# Altium PCB SCBD-10-63HP.PcbDoc
Units mm, origin at the board's own origin, x right, y up, seen from the top; angles counter-clockwise.
Board outline 31.37 x 27.3 mm, 2 copper layers (Top Layer, Bottom Layer); 7 components, 7 nets, 41 pads, 7 vias.
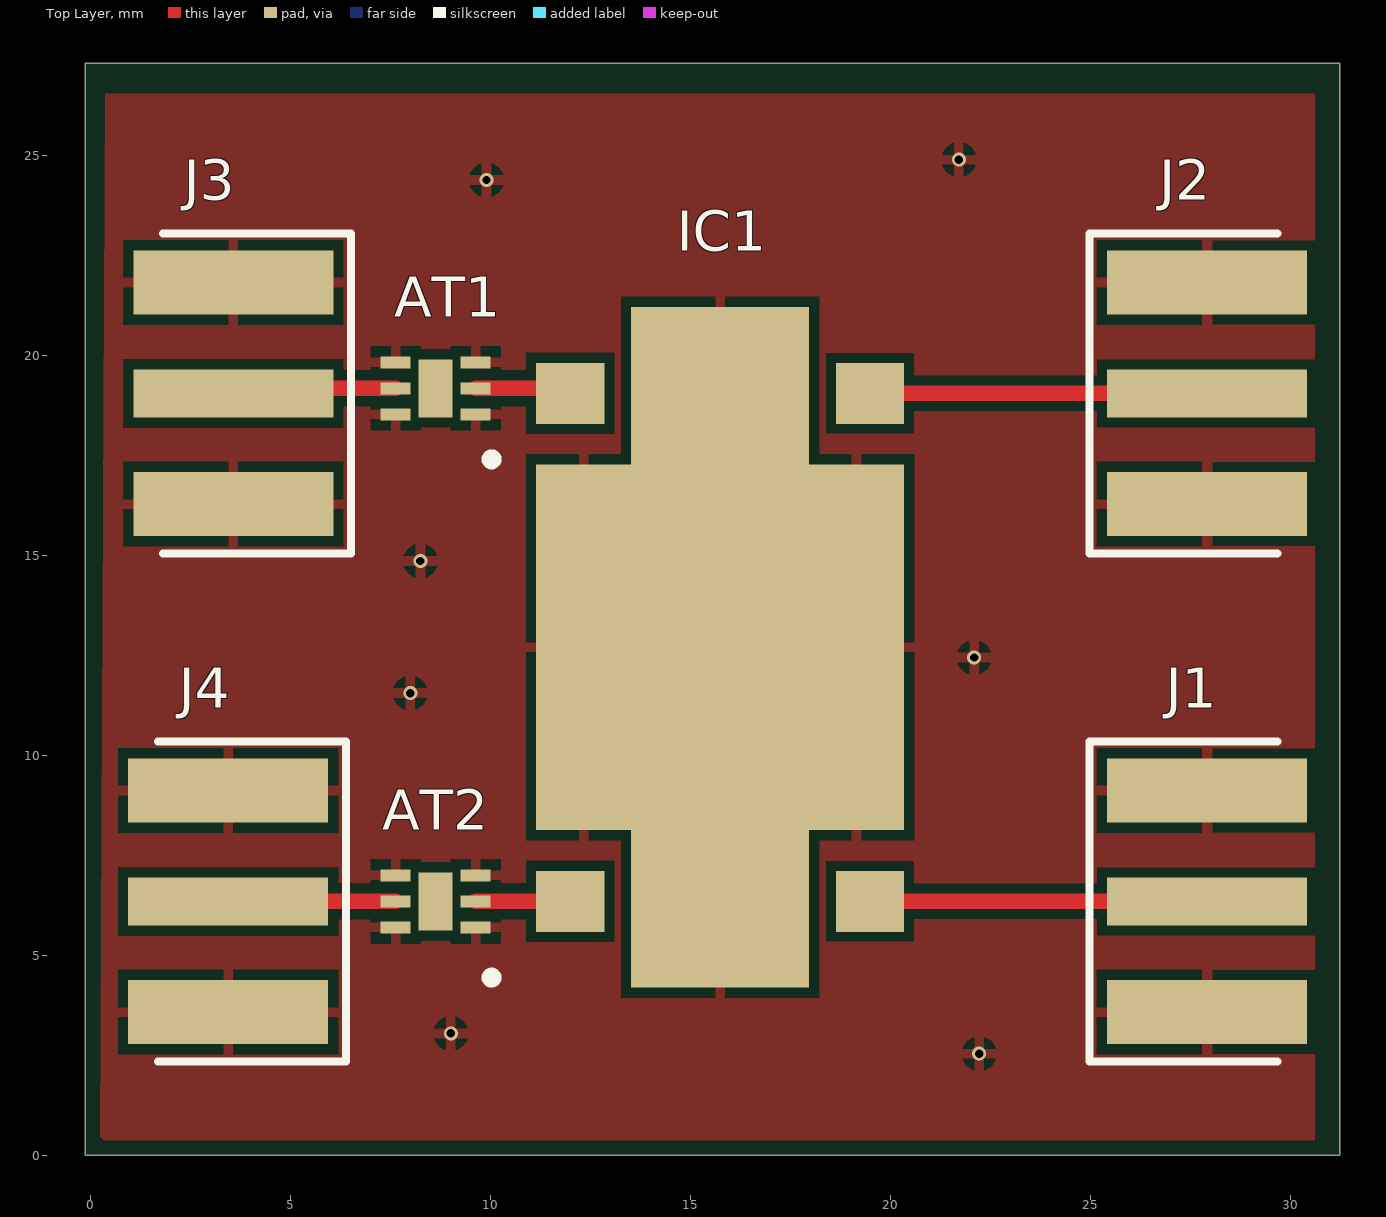
[diagram p0: Top Layer view]
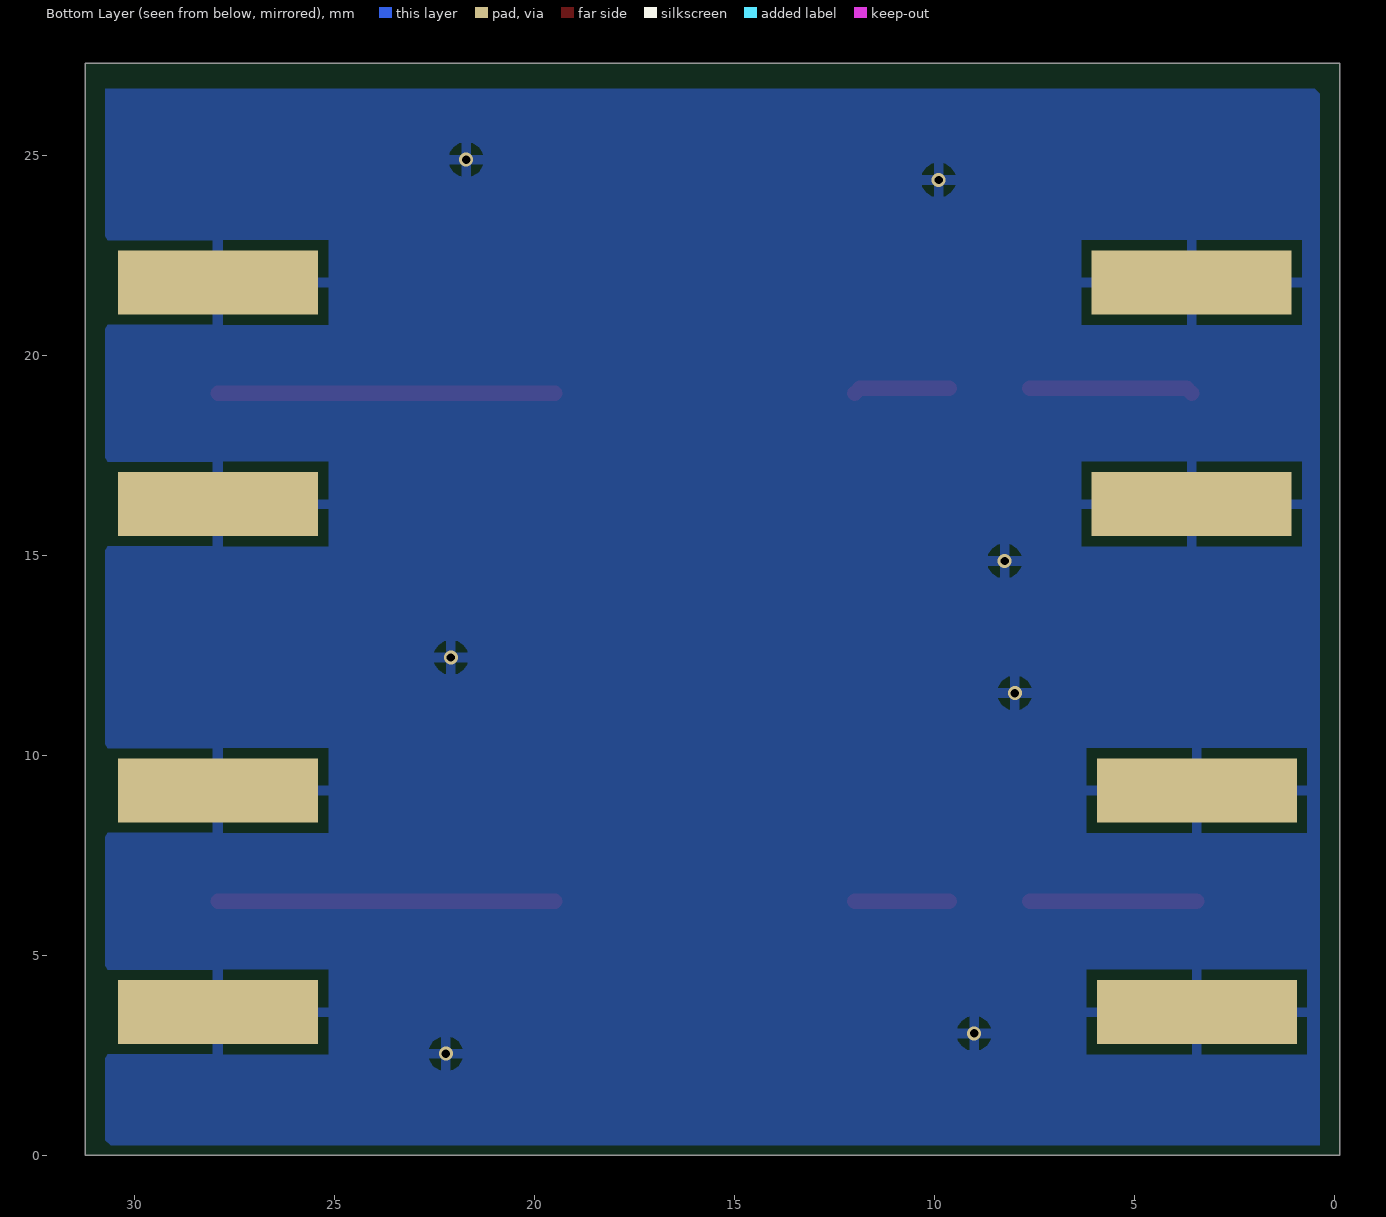
[diagram p1: Bottom Layer view, seen from below]
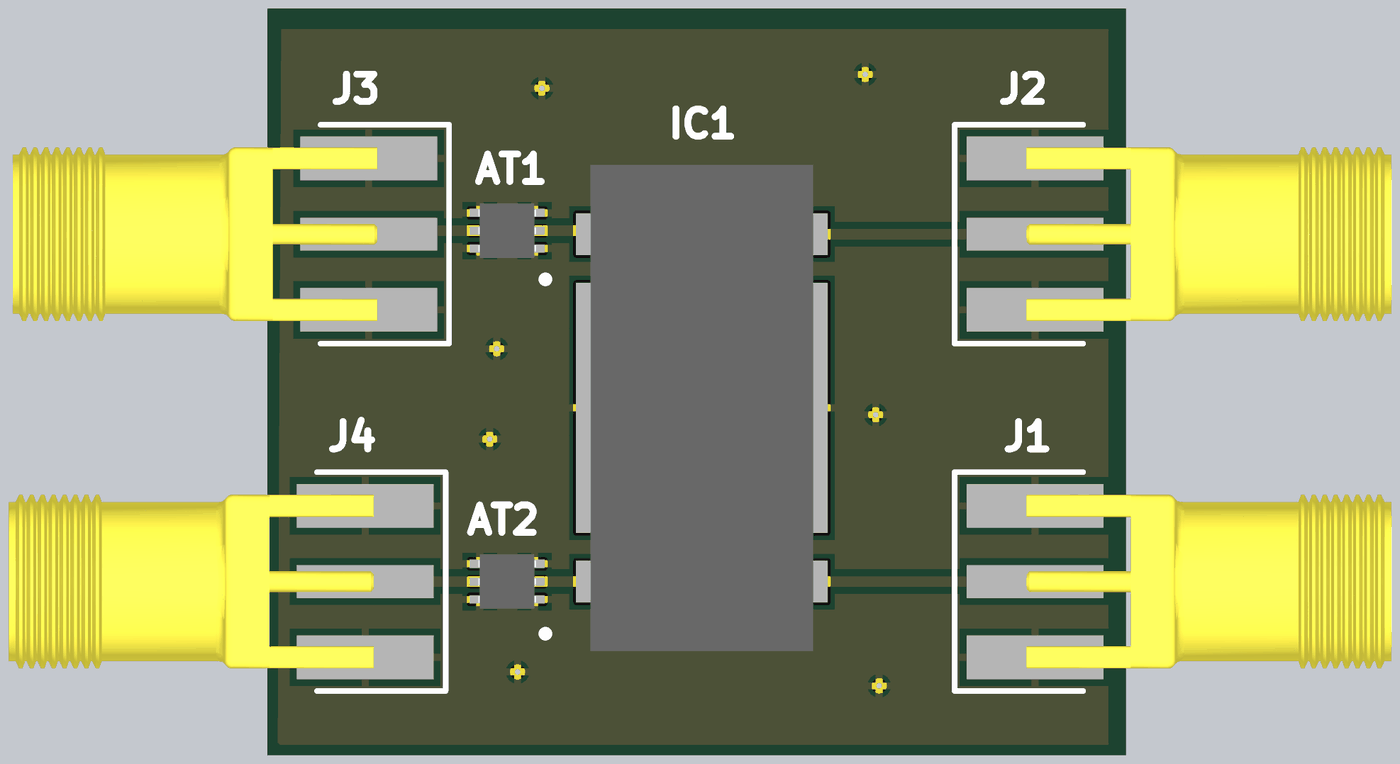
[diagram p2: 3D render of the assembled board from above, using the file's embedded part models]

## Layer stack, top to bottom
Top Solder: solder mask 0.0102, Solder Resist, Dk 3.5
Top Layer: signal copper 0.0356
Dielectric 1: dielectric 0.32, FR-4, Dk 4.8
Bottom Layer: signal copper 0.0356
Bottom Solder: solder mask 0.0102, Solder Resist, Dk 3.5

## Board outline
-0.127,0 31.242,0 31.242,27.305 -0.127,27.305

## Design rules (kind name [scope] priority, off if disabled: settings)
Clearance [All] p1: gap=0.254 ignorepadtopadclearanceinfootprint=FALSE except(0: Arc-Hole Track-Hole SMDPad-Hole THPad-Hole Via-Hole Fill-Hole Poly-Hole Region-Hole Text-Hole; 0.15: Arc-Arc Arc-Track Arc-SMDPad Track-Track Track-SMDPad SMDPad-SMDPad; 0.5: THPad-THPad)
MinimumSolderMaskSliver [All] p1: minsoldermaskwidth=0.1
PolygonConnect [All] p1: connectstyle=Relief reliefconductorwidth=0.254 reliefentries=4 polygonreliefangle="90 Angle" airgapwidth=0.254
RoutingLayers [All] p1: top layer_v5=TRUE bottom layer_v5=FALSE
RoutingVias [All] p1: holewidth=0.15 width=0.25 viastyle="Through Hole" minholewidth=0.15 minwidth=0.25 maxholewidth=0.2 maxwidth=0.3
SolderMaskExpansion [All] p1: expansion=0.102 istentingtop=FALSE
Width [All] p1: maxlimit=0.9 minlimit=0.15 preferedwidth=0.254 minimp=50.000000 maximp=50.000000 favimp=50.000000
28 further rules are at their usual default settings.

## Components (designator, comment, footprint, x,y, rotation, side; value= is the part's Value field where it differs from the comment)
AT1 "HMC656LP2ETR" SON65P200X200X100-7N 8.636,19.177 r180 top
AT2 "HMC656LP2ETR" SON65P200X200X100-7N 8.636,6.35 r180 top
IC1 "SCBD-16-63HP+" SCBD1663HP 15.748,12.7 r90 top
J1 "CON-SMA-EDGE-S" FP-CON-SMA-EDGE-S-MFG 35.179,6.35 r270 top
J2 "CON-SMA-EDGE-S" FP-CON-SMA-EDGE-S-MFG 35.179,19.05 r270 top
J3 "CON-SMA-EDGE-S" FP-CON-SMA-EDGE-S-MFG -3.683,19.05 r90 top
J4 "CON-SMA-EDGE-S" FP-CON-SMA-EDGE-S-MFG -3.81,6.35 r90 top

## Footprints (in the part's own frame and the unit in brackets; to place one, negate y for a bottom-side part, rotate by r counter-clockwise, add the part's x,y. Pads: shape width x height; smd on the part's side, far side on the other; paste and mask are expansions set on the pad)
FP-CON-SMA-EDGE-S-MFG [mm]
  rect 1.2x5 smd paste+0 mask+0: 1(0,-7.26)
  rect 1.6x5 smd paste+0 mask+0: 2(-2.77,-7.26) 3(2.77,-7.26)
  rect 1.6x5 smd far side paste+0 mask+0: 4(-2.77,-7.26) 5(2.77,-7.26)
  silkscreen extent -4,-10.2 4,-5.5, body extent -3.67,-9.86 3.67,4.86, height 0.25
SCBD1663HP [mil]
  rect 60x67.01 smd: 1(-250,-147.52) 2(250,-147.52) 3(250,147.52) 4(-250,147.52)
  rect 670x175 smd: 5(0,0)
  rect 360x93.5 smd: 6(0,-134.25) 7(0,134.25)
  body extent -350,-160 350,160, height 144
SON65P200X200X100-7N [mm]
  rect 0.75x0.3 smd: 1(-1,0.65) 2(-1,0) 3(-1,-0.65) 4(1,-0.65) 5(1,0) 6(1,0.65)
  rect 0.85x1.45 smd: 7(0,0)
  silkscreen extent -1.52,1.65 -1.27,1.9, body extent -1.05,-1 1.05,1, height 1

## Part data
AT1 AT2: "Attenuator or Isolator", Manufacturer_Name="Analog Devices", Mouser Part Number=584-HMC656LP2ETR, Arrow Part Number=HMC656LP2ETR, Arrow Price/Stock=https://www.arrow.com/en/products/hmc656lp2etr/analog-devices, Datasheet Link=https://www.analog.com/media/en/technical-documentation/data-sheets/hmc656lp2-hmc658lp2.pdf, Height=1mm, Manufacturer_Part_Number=HMC656LP2ETR, Mouser Price/Stock=https://www.mouser.co.uk/ProductDetail/Analog-Devices/HMC656LP2ETR?qs=3izLlwrMQ7khzsLKjIESFw%3D%3D
IC1: "Integrated Circuit", Manufacturer_Name=Mini-Circuits, Mouser Part Number=139-SCBD-16-63HP, Datasheet Link=https://www.mouser.com/ProductDetail/Mini-Circuits/PHA-202%2b?qs=xZ%2FP%252Ba9zWqZQB6K3pdIF%252Bw%3D%3D, Height=3.56mm, Manufacturer_Part_Number=SCBD-16-63HP+, Mouser Price/Stock=https://www.mouser.co.uk/ProductDetail/Mini-Circuits/SCBD-16-63HP%2b?qs=1Kr7Jg1SGW%252BMqB%2F891JKlw%3D%3D
J1 J2 J3 J4: library part CMP-204357-000001-1, "CONN SMA JACK STR EDGE MNT", Frequency=18GHz, Manufacturer="RF Solutions Ltd.", Package=CONN_JACK, Automotive=No, Category=Conn, ComponentLink2Description=Datasheet, ComponentLink2URL=https://www.rfsolutions.co.uk/downloads/1498648656DS-CON-EDGE-SMA-4.pdf, Conn Orientation="Right Angle", Contact Material=Gold, Device Class L1=Connectors, Device Class L2="RF / Coaxial Connectors", Device Class L3=unset, Digikey Description="CONN SMA JACK STR EDGE MNT", Footprint Url=https://forum.upverter.com/uploads/default/original/3X/b/e/be75b907af57498775929d6d9099689c472e0307.pdf, Height=6.35mm, Impedance=50Ω, Is Female=yes, Lead Free=Yes, Manufacturer Part Number=CON-SMA-EDGE-S, Number Of Contacts=1, Octopart=https://octopart.com/con-sma-edge-s-rf+solutions-70967450, RoHS=TRUE, Shielding=true

## Via types
v1: diameter 0.35, hole 0.21, Top Layer to Bottom Layer, 7 vias

## Nets (pads, with @x,y where several pads share a name; then routed paths per layer and width w, separated by ;. In a path a pad name is that pad's centre, name@x,y a point inside that pad or via, vN(x,y) a via of type N, cw(c..) or ccw(c..) an arc to the next point about the centre after c; other vN are vias at no path point)
GND: AT1.1 AT1.3 AT1.4 AT1.6 AT2.1 AT2.3 AT2.4 AT2.6 IC1.5 IC1.6 IC1.7 J1.2 J1.3 J1.4 J1.5 J2.2 J2.3 J2.4 J2.5 J3.2 J3.3 J3.4 J3.5 J4.2 J4.3 J4.4 J4.5
  other v1: 22.225,2.54 9.017,3.048 8.001,11.557 22.098,12.446 8.255,14.859 9.906,24.384 21.717,24.892
NetAT1_2: AT1.2 IC1.3 | length 2.4
  Top Layer w0.381: AT1.2 11.874,19.177 IC1.3
NetAT1_5: AT1.5 J3.1 | length 4.1
  Top Layer w0.381: J3.1 3.704,19.177 AT1.5
NetAT2_2: AT2.2 IC1.4 | length 2.4
  Top Layer w0.381: AT2.2 IC1.4
NetAT2_5: AT2.5 J4.1 | length 4.2
  Top Layer w0.381: J4.1 AT2.5
NetIC1_1: IC1.1 J1.1 | length 8.4
  Top Layer w0.381: IC1.1 J1.1
NetIC1_2: IC1.2 J2.1 | length 8.4
  Top Layer w0.381: IC1.2 J2.1
pads on no net: AT1.7 AT2.7

## Polygon pours and split planes (outlines as drawn)
GND on Bottom Layer "NONET_L-01_P-001" (solid, pour order 0): 0.381,26.543 0.508,26.67 30.734,26.67 30.734,0.381 30.607,0.254 0.381,0.254
GND on Top Layer "NONET_L-01_P-001" (solid, pour order 1): 0.381,26.543 30.607,26.543 30.607,0.381 0.254,0.381

## Silkscreen, mask and mechanical layers (free items; w line width, h text height)
Mechanical 1:
  lines w0.254: 0.381,27.051 30.988,27.051 30.988,0.127 0.127,0.127 0.127,27.051 1.016,27.051